# EAGLE board ir_gyro (EAGLE 4.16)
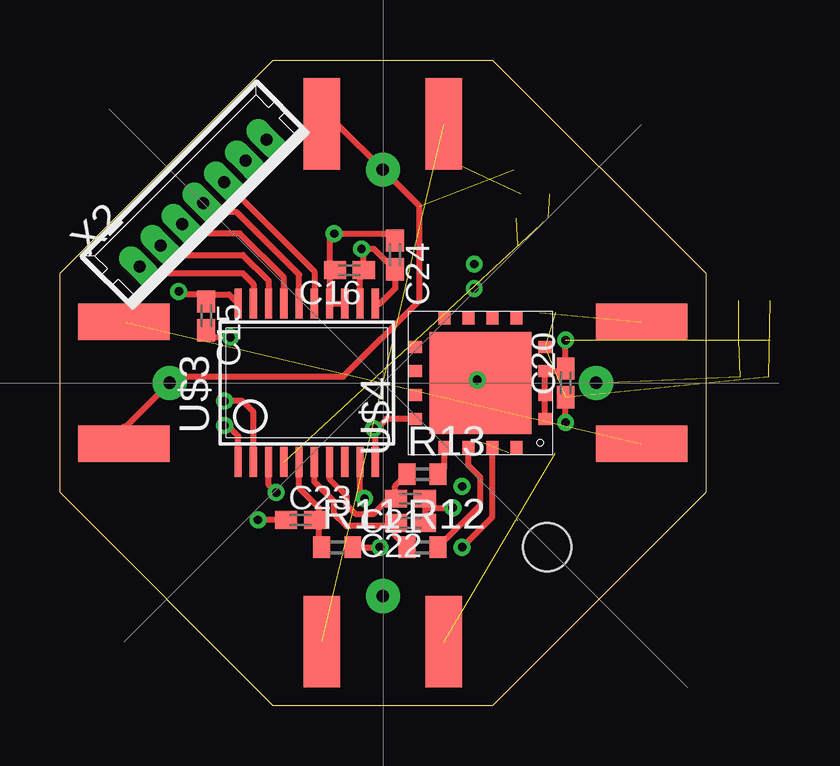
[diagram p0: board, top side]
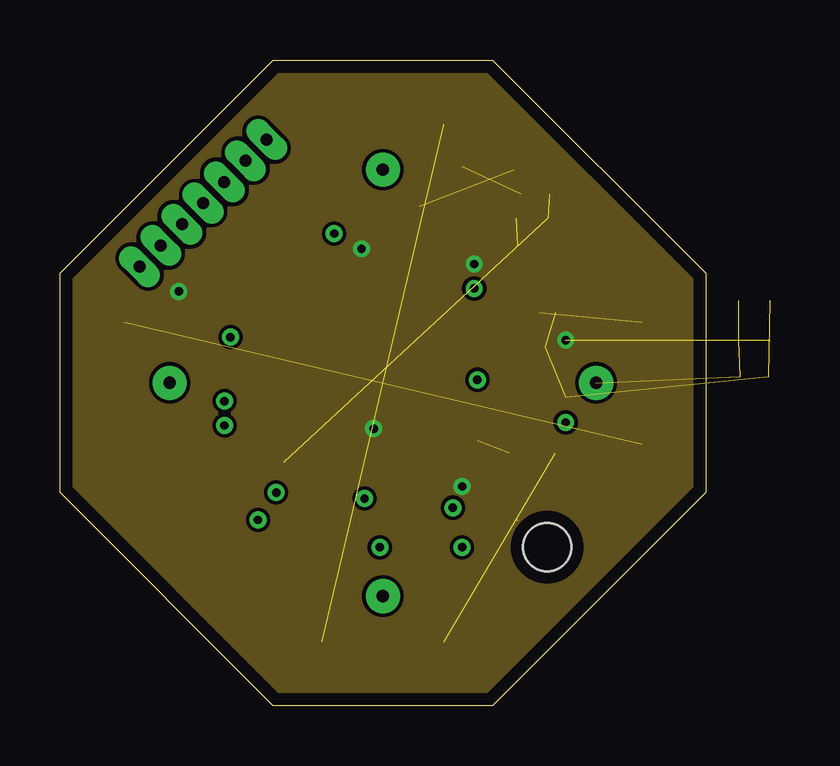
[diagram p1: board, inner layer Route2]
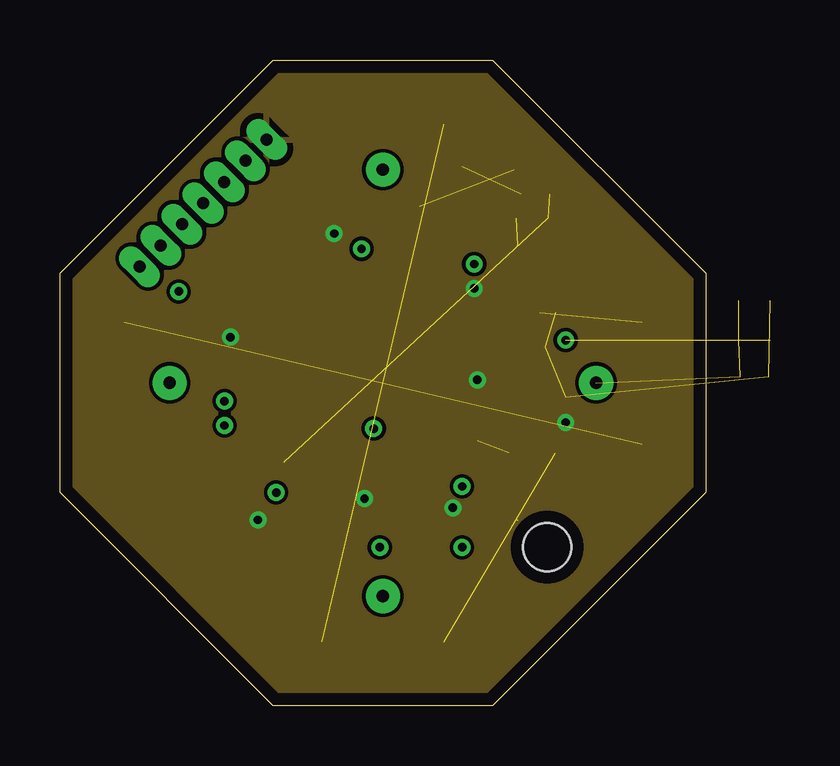
[diagram p2: board, inner layer Route15]
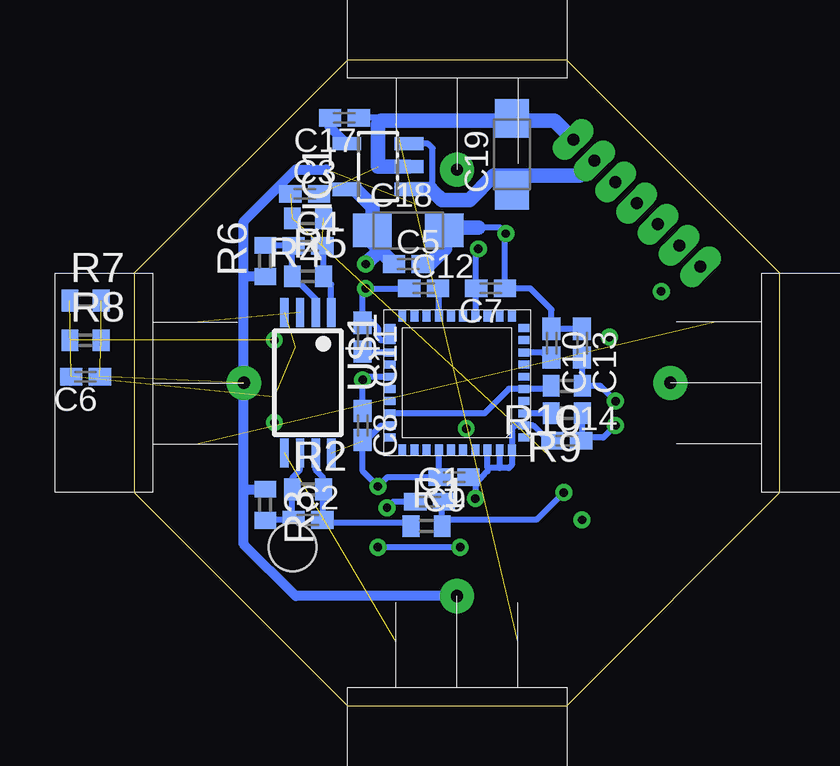
[diagram p3: board, bottom side, seen from below]

Size 26.92 x 26.92 mm. Coordinates in mm from the lower left corner, seen from the top.
Outline: 0,18.03 8.89,26.92 18.03,26.92 26.92,18.03 26.92,8.89 18.03,0 8.89,0 0,8.89 0,18.03
Copper layers (1*2+15*16): Top 0.035mm / dielectric 0.2mm / Route2 0.035mm / dielectric 1.5mm / Route15 0.035mm / dielectric 0.2mm / Bottom 0.035mm
Design rules "eurocircuits_verified_4l": minimum track width 0.15mm, minimum drill 0.35mm, track to track 0.15mm, track to pad 0.15mm, pad to pad 0.15mm, via to via 0.15mm, smd to smd 0.15mm, copper to edge 20mil, drill to drill 8mil, minimum pad ring 10mil, minimum via ring 7mil, stop-mask expansion 4mil, vias tented up to drill 0mil, thermal gap 10mil
Holes 2 mm at 20.32,6.6

## Footprints (pad centres in the part's own frame; a part is rotated, then mirrored left to right if it is on the bottom)
C0402K = smd 0.925 x 0.74: 1 -0.6,0; 2 0.6,0
SMC_A = smd 1.6 x 1.4: + -1.5,0; - 1.5,0
SOT23-5 = smd 0.55 x 1.2: 1 -0.95,-1.3; 2 0,-1.3; 3 0.95,-1.3; 4 0.95,1.3; 5 -0.95,1.3
R0402 = smd 0.7 x 0.9: 1 -0.65,0; 2 0.65,0
TO39H3 = smd 1.524 x 3.81 bottom: 1 2.54,-1.905; 3 -2.54,-1.905 | drill 0.508 pad 1.422 round: 4 0,-3.81
TSSOP8 = smd 0.35 x 1.2: 1 -0.975,-2.925; 2 -0.325,-2.925; 3 0.325,-2.925; 4 0.975,-2.925; 5 0.975,2.925; 6 0.325,2.925; 7 -0.325,2.925; 8 -0.975,2.925
IDG300 = smd 0.457 x 0.33: P$1 -2.794,2.286; P$2 -2.794,1.778; P$3 -2.794,1.27; P$4 -2.794,0.762; P$5 -2.794,0.254; P$6 -2.794,-0.254; P$7 -2.794,-0.762; P$8 -2.794,-1.27; P$9 -2.794,-1.778; P$10 -2.794,-2.286; P$21 2.794,-2.286; P$22 2.794,-1.778; P$23 2.794,-1.27; P$24 2.794,-0.762; P$25 2.794,-0.254; P$26 2.794,0.254; P$27 2.794,0.762; P$28 2.794,1.27; P$29 2.794,1.778; P$30 2.794,2.286 | smd 0.33 x 0.457: P$11 -2.286,-2.794; P$12 -1.778,-2.794; P$13 -1.27,-2.794; P$14 -0.762,-2.794; P$15 -0.254,-2.794; P$16 0.254,-2.794; P$17 0.762,-2.794; P$18 1.27,-2.794; P$19 1.778,-2.794; P$20 2.286,-2.794; P$31 2.286,2.794; P$32 1.778,2.794; P$33 1.27,2.794; P$34 0.762,2.794; P$35 0.254,2.794; P$36 -0.254,2.794; P$37 -0.762,2.794; P$38 -1.27,2.794; P$39 -1.778,2.794; P$40 -2.286,2.794
SSOP20 = smd 0.305 x 1.245: 1 -2.857,-3.302; 2 -2.222,-3.302; 3 -1.587,-3.302; 4 -0.952,-3.302; 5 -0.317,-3.302; 6 0.318,-3.302; 7 0.953,-3.302; 8 1.588,-3.302; 9 2.223,-3.302; 10 2.858,-3.302; 11 2.858,3.302; 12 2.223,3.302; 13 1.588,3.302; 14 0.953,3.302; 15 0.318,3.302; 16 -0.317,3.302; 17 -0.952,3.302; 18 -1.587,3.302; 19 -2.222,3.302; 20 -2.857,3.302
CASE162201 = smd 0.5 x 0.55: P$1 -1.5,-2.7; P$2 -0.5,-2.7; P$3 0.5,-2.7; P$4 1.5,-2.7; P$9 1.5,2.7; P$10 0.5,2.7; P$11 -0.5,2.7; P$12 -1.5,2.7 | smd 0.55 x 0.5: P$5 2.7,-1.5; P$6 2.7,-0.5; P$7 2.7,0.5; P$8 2.7,1.5; P$13 -2.7,1.5; P$14 -2.7,0.5; P$15 -2.7,-0.5; P$16 -2.7,-1.5 | smd 4.25 x 4.25: P$17 0,0
53047-07 = drill 0.5 pad 0.698 long: 1 3.75,0; 2 2.5,0; 3 1.25,0; 4 0,0; 5 -1.25,0; 6 -2.5,0; 7 -3.75,0

## Placement (x,y rotation side)
C1  100nF  [C0402K]  14.61,8.51 0 bottom
C2  100nF  [C0402K]  19.68,7.75 0 bottom
C3  100nF  [C0402K]  19.81,21.34 0 bottom
C4  100nF  [C0402K]  19.68,19.18 0 bottom
C5  100nF  [C0402K]  15.49,18.41 0 bottom
C6  100nF  [C0402K]  28.96,13.72 180 bottom
C7  100nF  [C0402K]  12.06,17.4 180 bottom
C8  100nF  [C0402K]  17.4,11.68 270 bottom
C9  100nF  [C0402K]  13.59,9.53 180 bottom
C10  220nF  [C0402K]  9.52,15.11 270 bottom
C11  220nF  [C0402K]  17.4,15.37 270 bottom
C12  100nF  [C0402K]  14.86,17.4 0 bottom
C13  100nF  [C0402K]  8.25,15.11 270 bottom
C14  100nF  [C0402K]  8.89,11.05 0 bottom
C15  100nF  [C0402K]  6.1,16.26 270 top
C16  100nF  [C0402K]  12.06,18.16 180 top
C17  470pf  [C0402K]  18.16,24.51 180 bottom
C18  [SMC_A]  15.49,19.81 0 bottom
C19  [SMC_A]  11.18,22.99 90 bottom
C20  100nF  [C0402K]  21.08,13.46 90 top
C21  100nF  [C0402K]  14.61,8.64 180 top
C22  100nF  [C0402K]  14.61,7.62 180 top
C23  100nF  [C0402K]  10.03,7.75 0 top
C24  100nF  [C0402K]  13.97,18.8 270 top
IC1  MIC5205-3.3BM5  [SOT23-5]  16.76,22.48 90 bottom
R1  200  [R0402]  14.73,7.49 0 bottom
R2  1.1M  [R0402]  19.68,9.02 0 bottom
R3  1K  [R0402]  21.46,8.38 270 bottom
R4  200  [R0402]  19.68,20.32 180 bottom
R5  1.1M  [R0402]  19.68,17.91 0 bottom
R6  1K  [R0402]  21.46,18.54 90 bottom
R7  1K  [R0402]  28.96,16.89 0 bottom
R8  1K  [R0402]  28.96,15.24 0 bottom
R9  750R  [R0402]  8.89,12.19 180 bottom
R10  750R  [R0402]  8.89,13.33 180 bottom
R11  750R  [R0402]  11.56,6.6 0 top
R12  750R  [R0402]  15.11,6.6 0 top
R13  750R  [R0402]  15.11,9.65 0 top
TP1  MLX902473  [TO39H3]  13.46,26.16 0 bottom
TP2  MLX902473  [TO39H3]  13.46,0.76 180 bottom
TP3  MLX902473  [TO39H3]  26.16,13.46 90 bottom
TP4  MLX902473  [TO39H3]  0.76,13.46 270 bottom
U$1  AD8552RU  [TSSOP8]  19.68,13.46 180 bottom
U$2  IDG300  [IDG300]  13.46,13.46 180 bottom
U$3  ADS8344  [SSOP20]  10.29,13.46 0 top
U$4  MMA7260  [CASE162201]  17.53,13.46 90 top
X2  [53047-07]  5.97,20.95 45 top

## Library data of the parts
C1-C24 R1-R13 = rcl
IC1 = v-reg-micrel
TP1-TP4 U$1-U$4 = paparazzi
X2 = con-molex

## Nets
ACCEL_X: C23.2 R11.1 U$3.5
ACCEL_Y: C22.2 R12.1 U$3.6
ACCEL_Z: C21.2 R13.1 U$3.7
BUSY: U$3.16 X2.4
GND: C1.1 C3.2 C5.2 C6.2 C7.1 C8.1 C9.1 C10.1 C11.1 C12.1 C13.1 C14.1 C15.2 C16.2 C17.1 C18.- C19.- C20.1 C21.1 C22.1 C23.1 C24.1 IC1.2 R7.1 U$1.4 U$2.P$2 U$2.P$22 U$2.P$25 U$2.P$38 U$2.P$39 U$2.P$40 U$3.9 U$3.13 U$3.14 U$4.P$4 X2.1
IR1: C1.2 R1.2 U$3.3
IR2: C3.1 R4.2 U$3.4
MISO: U$3.15 X2.3
MOSI: U$3.17 X2.5
N$1: TP3.3 TP4.3
N$3: TP2.1 U$1.5
N$5: C11.2 U$2.P$23
N$6: C2.2 R1.1 R2.2 U$1.7
N$7: C2.1 R2.1 R3.2 U$1.6
N$8: C4.2 R4.1 R5.2 U$1.1
N$9: C10.2 U$2.P$8
N$10: R9.2 U$2.P$3
N$11: TP3.1 U$1.3
N$12: R10.2 U$2.P$28
N$13: R11.2 U$4.P$15
N$14: R12.2 U$4.P$14
N$15: C12.2 U$2.P$17
N$16: C17.2 IC1.4
N$18: R13.2 U$4.P$13
N$19: TP1.3 TP2.3
N$125: C4.1 R5.1 R6.2 U$1.2
RATE_X: C14.2 R9.1 U$3.1
RATE_Y: C13.2 R10.1 U$3.2
SCK: U$3.19 X2.7
SS: U$3.18 X2.6
VBAT: C19.+ IC1.1 IC1.3 X2.2
VCC: C5.1 C7.2 C8.2 C9.2 C15.1 C16.1 C18.+ C20.2 C24.2 IC1.5 R8.1 U$1.8 U$2.P$14 U$2.P$29 U$2.P$34 U$3.10 U$3.11 U$3.12 U$3.20 U$4.P$1 U$4.P$2 U$4.P$3 U$4.P$12
VCC/2: C6.1 R3.1 R6.1 R7.2 R8.2 TP1.1 TP1.4 TP2.4 TP3.4 TP4.1 TP4.4

## Tracks (layer width: path | path; a pad name or v marks a point on that pad's centre or on a via)
ACCEL_X
  Top 0.254: 10.79,7.75 10.79,8.26 9.97,9.08 U$3.5 | 10.79,7.75 C23.2 | R11.1 10.79,6.72 10.79,7.75
ACCEL_Y
  Top 0.254: R12.1 13.97,7.1 13.97,7.49 | 13.97,7.49 13.97,7.62 C22.2 13.97,7.58 13.97,7.49 | U$3.6 10.61,9.33 11.43,8.51 11.43,8 11.94,7.49 13.97,7.49
ACCEL_Z
  Top 0.254: R13.1 13.97,9.16 13.97,8.64 | 13.97,8.64 C21.2 | U$3.7 11.24,9.46 11.94,8.76 11.94,8.38 12.32,8 13.08,8 13.72,8.64 13.97,8.64
BUSY
  Top 0.254: U$3.16 9.97,17.97 7.37,20.57 6.35,20.57 X2.4
GND  (via drill 0.35)  (5 unrouted)
  Top 0.254: C22.1 15.24,7.62 15.24,8.26 | 15.24,8.26 15.24,8.6 C21.1 | 15.24,8.26 v16.38,8.26 | C23.1 v8.25,7.75 | C16.2 11.43,18.16 11.24,17.97 | 11.24,17.97 U$3.14 U$3.13 | 11.24,17.97 11.24,19.49 v11.43,19.69 13.68,19.69 C24.1 | U$3.9 12.51,8.83 v12.7,8.64 | C15.2 6.39,15.37 v7.11,15.37 | v21.08,11.81 C20.1
  Bottom 0.254: C14.1 9.65,11.05 10.29,11.68 U$2.P$2 11.05,11.68 11.18,11.56 U$2.P$40 11.18,10.03 11.3,9.91 11.68,9.91 | 12.19,9.91 12.19,9.78 12.45,9.53 | 12.19,9.91 U$2.P$38 | 11.68,9.91 12.19,9.91 | 11.68,9.91 U$2.P$39 | 17.4,16 17.4,17.27 v17.27,17.4 C12.1 | U$2.P$22 16.64,15.24 16.76,15.37 16.76,15.75 17.02,16 17.4,16 | C11.1 17.4,16 | U$2.P$25 17.4,13.72 v17.4,13.59 C8.1 | 16.64,24.38 16.64,24.51 C17.1 | 12.57,19.94 11.68,19.94 v11.43,19.69 11.46,19.47 C7.1 10.41,17.4 9.52,16.51 9.52,15.75 | 14.61,18.41 C5.2 | 9.52,15.75 C10.1 | C13.1 9.49,15.71 9.52,15.75 | 12.45,9.53 12.7,9.27 v12.7,8.64 | 12.45,9.53 C9.1 | C1.1 16.13,8.51 v16.38,8.26
  Bottom 0.61: X2.1 9.4,24.38 11.18,24.38 | IC1.2 16.76,22.48 16.76,24.26 16.64,24.38 11.18,24.38 | 12.57,19.94 13.97,19.94 | 14.61,18.41 13.97,19.05 13.97,19.94 | 13.97,19.94 13.99,19.91 C18.- | 11.18,24.38 C19.-
  pour Route15: 8.89,26.92 18.03,26.92 26.92,18.03 26.92,8.89 18.03,0 8.89,0 0,8.89 0,18.03
IR1  (via drill 0.35)
  Top 0.254: U$3.3 8.7,9.21 v9.02,8.89
  Bottom 0.254: C1.2 13.97,8.51 14.08,8.4 R1.2 14.1,7.51 14.1,7.75 10.16,7.75 v9.02,8.89
IR2  (2 unrouted)
MISO
  Top 0.254: X2.3 10.61,18.1 U$3.15
MOSI
  Top 0.254: U$3.17 9.33,17.84 7.49,19.69 5.46,19.69 X2.5
N$1  (1 unrouted)
N$3  (1 unrouted)
N$5
  Bottom 0.254: C11.2 17.4,14.73 U$2.P$23
N$6  (1 unrouted)
  Bottom 0.254: U$1.7 19.36,9.83 19.05,9.53 R2.2 R2.2 arc-90 R2.2 19.05,7.75 18.92,7.62 15.37,7.62 15.37,7.51 R1.1
N$7
  Bottom 0.254: C2.1 20.32,7.75 20.33,7.76 | 20.33,7.76 R2.1 20.32,9.53 20.01,9.83 U$1.6 | R3.2 21.59,7.75 20.35,7.75 20.33,7.76
N$8  (2 unrouted)
  Bottom 0.254: U$1.1 18.71,17.57 R5.2 19.04,19.16 19.05,19.18
N$9
  Bottom 0.254: C10.2 9.52,14.35 9.91,14.73 U$2.P$8
N$10
  Bottom 0.254: 9.52,12.19 R9.2 U$2.P$3
N$11  (1 unrouted)
N$12
  Bottom 0.254: R10.2 9.52,13.33 9.65,13.21 11.3,13.21 12.32,12.19 U$2.P$28
N$13  (via drill 0.35)
  Top 0.254: R11.2 v13.33,6.6 | U$4.P$15 18.03,7.87 v16.76,6.6
  Bottom 0.254: v13.33,6.6 v16.76,6.6
N$14
  Top 0.254: R12.2 15.75,6.6 17.53,8.38 17.53,9.53 17.03,10.03 U$4.P$14
N$15
  Bottom 0.254: C12.2 14.22,17.4 U$2.P$17
N$16
  Bottom 0.406: C17.2 18.8,24.51 18.8,24.16 IC1.4
N$18
  Top 0.254: R13.2 15.75,9.65 16.03,9.93 U$4.P$13
N$19  (1 unrouted)
N$125
  Bottom 0.254: 20.32,19.18 C4.1 | 20.32,19.18 20.33,19.16 R5.1 19.36,16.95 U$1.2 | R6.2 21.46,19.18 20.32,19.18
RATE_X  (via drill 0.35)
  Top 0.254: U$3.1 7.43,11.24 6.99,11.68 v6.86,11.68
  Bottom 0.203: 8.24,11.56 8.25,11.56
  Bottom 0.254: 8.25,12.19 R9.1 8.24,11.56 8.24,11.06 8.25,11.05 C14.2 8.25,11.08 8.25,11.18 7.37,11.18 v6.86,11.68
RATE_Y  (via drill 0.35)
  Top 0.254: U$3.2 8.07,12.26 7.62,12.7 v6.86,12.7
  Bottom 0.254: C13.2 8.25,14.35 8.24,14.34 R10.1 | R10.1 8.25,13.33 | v6.86,12.7 7.49,13.33 R10.1
SCK
  Top 0.254: U$3.19 8.07,17.59 7.62,18.03 3.56,18.03 3.3,18.29 X2.7
SS
  Top 0.254: U$3.18 8.7,17.72 7.62,18.8 4.57,18.8 4.19,19.18 X2.6
VBAT
  Bottom 0.254: 14.48,21.46 14.48,23.24 14.67,23.43 15.31,23.43 15.37,23.37 15.43,23.43 IC1.3
  Bottom 0.61: IC1.1 14.54,21.53 14.48,21.46 14.1,21.08 12.95,21.08 11.94,22.1 10.79,22.1 10.73,22.03 | 11.18,21.08 C19.+ 11.18,21.59 10.73,22.03 | X2.2 8.36,22.1 10.67,22.1 10.73,22.03
VCC  (via drill 0.35)  (2 unrouted)
  Top 0.254: 21.08,14.1 20.95,13.96 U$4.P$3 20.23,12.99 20.2,12.96 | 20.2,12.96 20.19,12.95 20.23,12.92 U$4.P$1 | 20.2,12.96 U$4.P$2 | 13.14,11.43 13.14,11.49 13.61,11.96 U$4.P$12 | 13.14,11.43 U$3.10 | U$3.12 12.51,17.97 12.7,18.16 C16.1 12.66,18.96 v12.57,19.05 13.08,19.05 13.93,18.2 C24.2 13.97,17.4 13.33,16.76 U$3.11 | 13.14,11.43 13.21,11.43 v13.08,11.56 | U$3.20 7.05,17.15 6.1,17.15 | C15.1 6.1,17.15 | v4.95,17.27 5.08,17.15 6.1,17.15 | 21.08,14.1 C20.2 | 21.08,14.1 v21.08,15.24
  Bottom 0.254: 12.7,17.4 C7.2 | 12.7,17.4 U$2.P$14 | U$2.P$29 16.64,11.68 17.27,11.05 17.4,11.05 | 12.7,17.4 12.7,18.92 v12.57,19.05 | 14.22,9.53 U$2.P$34 | 17.4,11.05 17.4,9.78 v16.76,9.14 16.38,9.53 14.22,9.53 | 17.4,11.05 C8.2 | C9.2 14.22,9.53
  Bottom 0.61: IC1.5 17.72,21.53 16.99,20.8 C18.+ 17.02,19.81 17.02,19.34 16.68,19 | C5.1 16.68,19 | 16.68,19 16.64,19.05 | 16.68,19 v17.27,18.41
  pour Route2: 8.89,26.92 18.03,26.92 26.92,18.03 26.92,8.89 18.03,0 8.89,0 0,8.89 0,18.03
VCC/2  (4 unrouted)
  Top 0.254: TP1.1 11.56,24.26 TP1.4 14.99,20.83 14.99,16.89 11.81,13.72 4.83,13.72 TP4.4 2.67,11.56
  Top 0.406: TP4.1 2.67,11.56
  Bottom 0.406: R3.1 21.59,9.02 22.35,9.02 | 22.35,9.02 22.35,6.73 20.19,4.57 TP2.4 | 22.35,9.02 TP3.4 22.35,17.91 | 22.35,17.91 22.35,20.19 20.19,22.35 18.92,22.35 | R6.1 21.48,17.91 22.35,17.91